# Altium PCB 44TSOPBreakout.PcbDoc
Units mil, origin at the board's own origin, x right, y up, seen from the top; angles counter-clockwise.
Board outline 2000 x 2000 mil, 2 copper layers (Top Layer, Bottom Layer); 5 components, 44 nets, 88 pads, 0 vias.
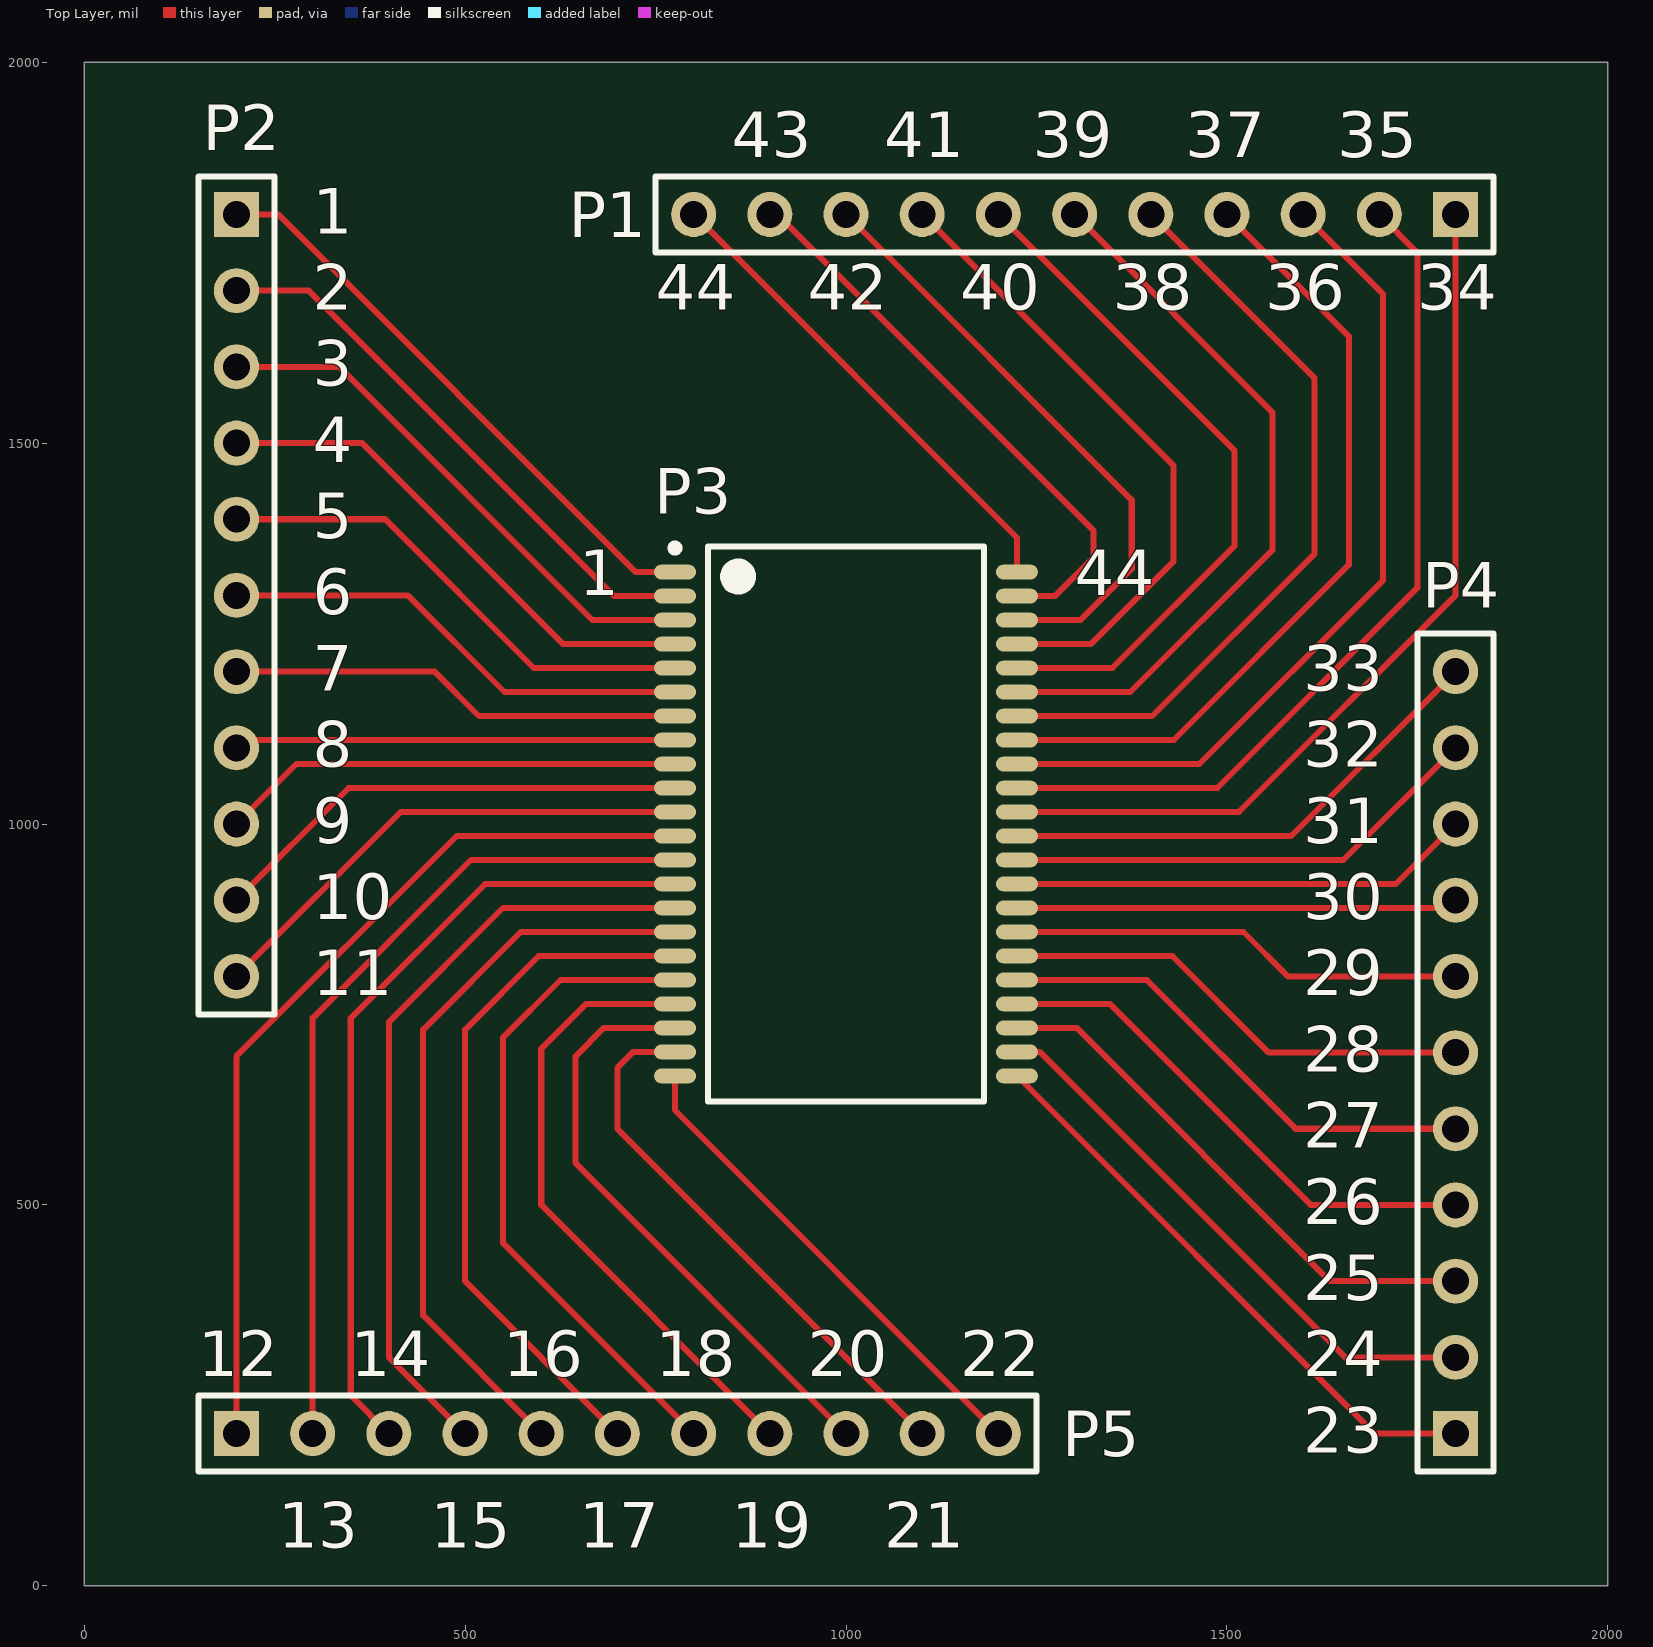
[diagram p0: Top Layer view]
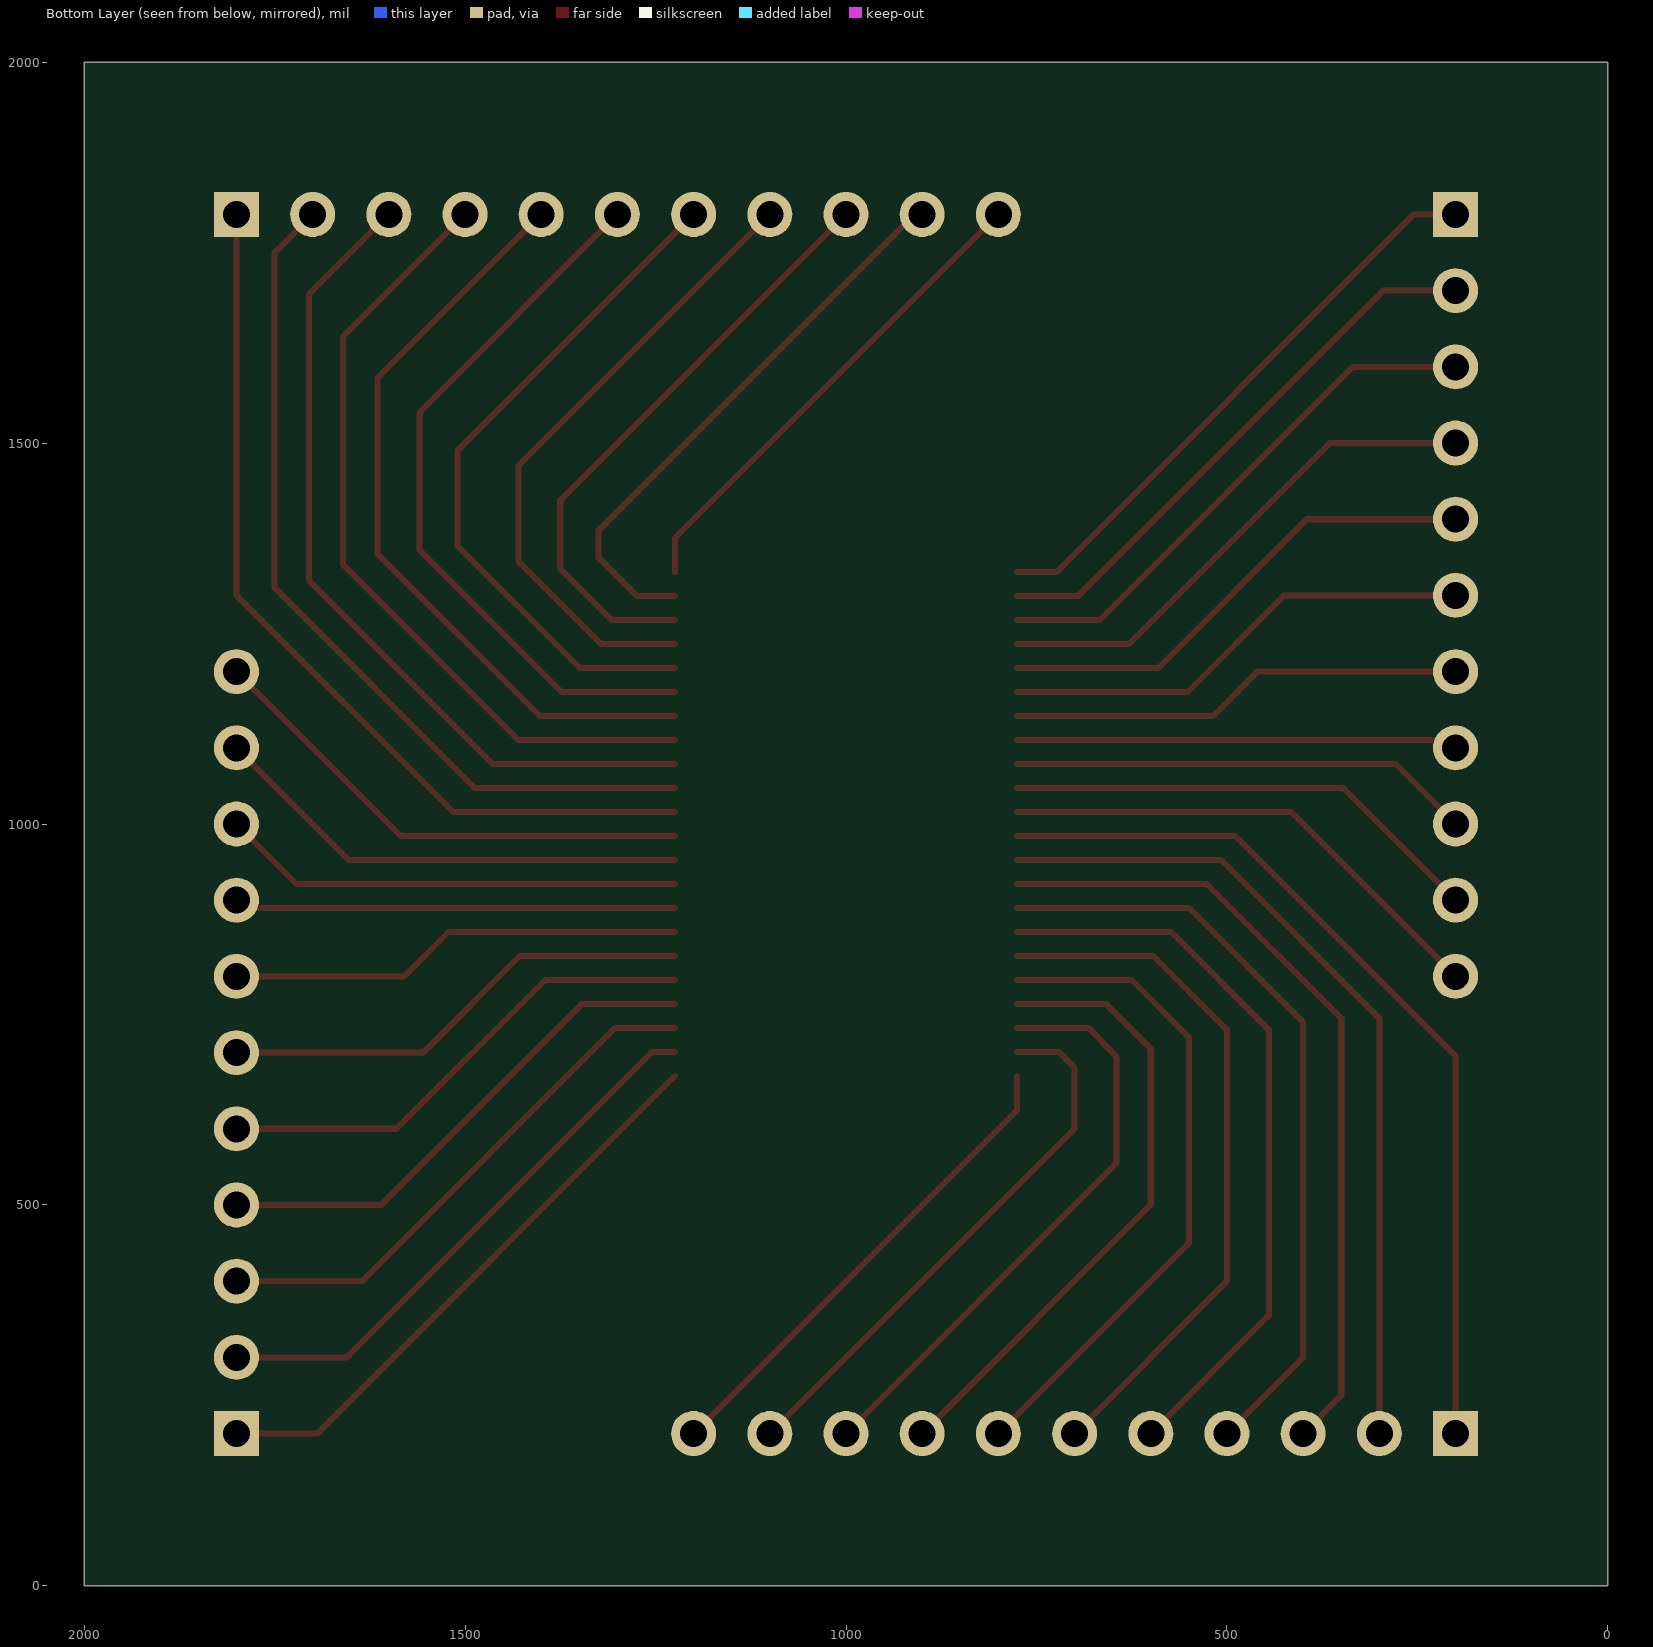
[diagram p1: Bottom Layer view, seen from below]

## Layer stack, top to bottom
Top Solder: solder mask 0.4, Solder Resist, Dk 3.5
Top Layer: signal copper 1.4
Dielectric 1: dielectric 12.6, FR-4, Dk 4.8
Bottom Layer: signal copper 1.4
Bottom Solder: solder mask 0.4, Solder Resist, Dk 3.5

## Board outline
0,0 2000,0 2000,2000 0,2000

## Design rules (kind name [scope] priority, off if disabled: settings)
Clearance [All] p1: gap=8
PolygonConnect [All] p1: connectstyle=Relief reliefconductorwidth=10 reliefentries=4 polygonreliefangle="90 Angle" airgapwidth=10
RoutingVias [All] p1: holewidth=25 width=40 viastyle="Through Hole" minholewidth=28 minwidth=50 maxholewidth=28 maxwidth=50
SolderMaskExpansion [All] p1: expansion=4
Width [All] p1: maxlimit=8 minlimit=8 preferedwidth=8
29 further rules are at their usual default settings.

## Components (designator, comment, footprint, x,y, rotation, side; value= is the part's Value field where it differs from the comment)
P1 "Header 11" HDR1X11 1800,1800 r180 top
P2 "Header 11" HDR1X11 200,1800 r270 top
P3 "71V016SA10PHG8" TSOP80P1180X119-44N 1000,1000 r0 top
P4 "Header 11" HDR1X11 1800,200 r90 top
P5 "Header 11" HDR1X11 200,200 r0 top

## Footprints (in the part's own frame and the unit in brackets; to place one, negate y for a bottom-side part, rotate by r counter-clockwise, add the part's x,y. Pads: shape width x height; smd on the part's side, far side on the other; paste and mask are expansions set on the pad)
HDR1X11 [mm] "Connector; Header; 11 Position"
  rect 1.5x1.5 hole 0.9: 1(0,0)
  round 1.5 hole 0.9: 2(2.54,0) 3(5.08,0) 4(7.62,0) 5(10.16,0) 6(12.7,0) 7(15.24,0) 8(17.78,0) 9(20.32,0) 10(22.86,0) 11(25.4,0)
  silkscreen extent -1.27,-1.27 26.67,1.27
TSOP80P1180X119-44N [mm] "TSOP, 44-Leads, Body 18.41x10.16mm, Pitch 0.80mm, IPC Medium Density"
  oval 1.4x0.5 smd: 1(-5.7,8.4) 2(-5.7,7.6) 3(-5.7,6.8) 4(-5.7,6) 5(-5.7,5.2) 6(-5.7,4.4) 7(-5.7,3.6) 8(-5.7,2.8) 9(-5.7,2) 10(-5.7,1.2) 11(-5.7,0.4) 12(-5.7,-0.4) 13(-5.7,-1.2) 14(-5.7,-2) 15(-5.7,-2.8) 16(-5.7,-3.6) 17(-5.7,-4.4) 18(-5.7,-5.2) 19(-5.7,-6) 20(-5.7,-6.8) 21(-5.7,-7.6) 22(-5.7,-8.4) 23(5.7,-8.4) 24(5.7,-7.6) 25(5.7,-6.8) 26(5.7,-6) 27(5.7,-5.2) 28(5.7,-4.4) 29(5.7,-3.6) 30(5.7,-2.8) 31(5.7,-2) 32(5.7,-1.2) 33(5.7,-0.4) 34(5.7,0.4) 35(5.7,1.2) 36(5.7,2) 37(5.7,2.8) 38(5.7,3.6) 39(5.7,4.4) 40(5.7,5.2) 41(5.7,6) 42(5.7,6.8) 43(5.7,7.6) 44(5.7,8.4)
  silkscreen extent -5.82,-9.25 4.6,9.32, body extent -5.15,-9.25 5.15,9.25, height 1.2

## Part data
P1 P2 P4 P5: "Header, 11-Pin"
P3: "IC SRAM 1MBIT 10NS 44TSOP"

## Nets (pads, with @x,y where several pads share a name; then routed paths per layer and width w, separated by ;. In a path a pad name is that pad's centre, name@x,y a point inside that pad or via, vN(x,y) a via of type N, cw(c..) or ccw(c..) an arc to the next point about the centre after c; other vN are vias at no path point)
NetP1_1: P1.1 P3.34 | length 1193.3
  Top Layer w8: P3.34 1515.75,1015.75 1800,1300 P1.1
NetP1_2: P1.2 P3.35 | length 1145.1
  Top Layer w8: P3.35 1487.24,1047.24 1750,1310 1750,1750 P1.2
NetP1_3: P1.3 P3.36 | length 1104
  Top Layer w8: P3.36 1463.74,1078.74 1705,1320 1705,1695 P1.3
NetP1_4: P1.4 P3.37 | length 1057
  Top Layer w8: P3.37 1430.24,1110.24 1660,1340 1660,1640 P1.4
NetP1_5: P1.5 P3.38 | length 1013
  Top Layer w8: P3.38 1401.73,1141.73 1615,1355 1615,1585 P1.5
NetP1_6: P1.6 P3.39 | length 960.6
  Top Layer w8: P3.39 1373.23,1173.23 1560,1360 1560,1540 P1.6
NetP1_7: P1.7 P3.40 | length 915.4
  Top Layer w8: P1.7 1510,1490 1510,1365 1349.72,1204.72 P3.40
NetP1_8: P1.8 P3.41 | length 842.3
  Top Layer w8: P1.8 1430,1470 1430,1345 1321.22,1236.22 P3.41
NetP1_9: P1.9 P3.42 | length 798.8
  Top Layer w8: P1.9 1375,1425 1375,1335 1307.72,1267.72 P3.42
NetP1_10: P1.10 P3.43 | length 743.5
  Top Layer w8: P1.10@910,1800 1325,1385 1325,1350 1274.21,1299.21 P3.43
NetP1_11: P1.11 P3.44 | length 645.1
  Top Layer w8: P1.11 1224.41,1375.59 P3.44
NetP2_1: P2.1 P3.1 | length 770
  Top Layer w8: P2.1 255,1800 724.29,1330.71 P3.1
NetP2_2: P2.2 P3.2 | length 741.6
  Top Layer w8: P2.2 295,1700 695.79,1299.21 P3.2
NetP2_3: P2.3 P3.3 | length 713.2
  Top Layer w8: P2.3 335,1600 667.28,1267.72 P3.3
NetP2_4: P2.4 P3.4 | length 684.9
  Top Layer w8: P2.4 365,1500 628.78,1236.22 P3.4
NetP2_5: P2.5 P3.5 | length 656.5
  Top Layer w8: P2.5 395,1400 590.28,1204.72 P3.5
NetP2_6: P2.6 P3.6 | length 628.1
  Top Layer w8: P2.6 425,1300 551.77,1173.23 P3.6
NetP2_7: P2.7 P3.7 | length 599.7
  Top Layer w8: P2.7 460,1200 518.27,1141.73 P3.7
NetP2_8: P2.8 P3.8 | length 579.8
  Top Layer w8: P2.8 210.24,1110.24 P3.8
NetP2_9: P2.9 P3.9 | length 608.2
  Top Layer w8: P2.9 278.74,1078.74 P3.9
NetP2_10: P2.10 P3.10 | length 636.6
  Top Layer w8: P2.10 347.24,1047.24 P3.10
NetP2_11: P2.11 P3.11 | length 665
  Top Layer w8: P2.11 415.75,1015.75 P3.11
NetP3_12: P3.12 P5.1 | length 1190.4
  Top Layer w8: P5.1 200,695 489.25,984.25 P3.12
NetP3_13: P3.13 P5.2 | length 1106.6
  Top Layer w8: P5.2 300,745 507.76,952.76 P3.13
NetP3_14: P3.14 P5.3 | length 1064.3
  Top Layer w8: P5.3 350,250 350,745 526.26,921.26 P3.14
NetP3_15: P3.15 P5.4 | length 1019
  Top Layer w8: P5.4 400,300 400,740 549.76,889.76 P3.15
NetP3_16: P3.16 P5.5 | length 977.9
  Top Layer w8: P5.5 445,355 445,730 573.27,858.27 P3.16
NetP3_17: P3.17 P5.6 | length 928.5
  Top Layer w8: P5.6 500,400 500,730 596.77,826.77 P3.17
NetP3_18: P3.18 P5.7 | length 880.3
  Top Layer w8: P3.18 625.28,795.28 550,720 550,450 P5.7
NetP3_19: P3.19 P5.8 | length 829.2
  Top Layer w8: P3.19 658.78,763.78 600,705 600,500 P5.8
NetP3_20: P3.20 P5.9 | length 788.1
  Top Layer w8: P3.20 682.28,732.28 645,695 645,555 P5.9
NetP3_21: P3.21 P5.10 | length 729.9
  Top Layer w8: P3.21 720.79,700.79 700,680 700,600 P5.10
NetP3_22: P3.22 P5.11 | length 645.1
  Top Layer w8: P3.22 775.59,624.41 P5.11
NetP3_23: P3.23 P4.1 | length 770
  Top Layer w8: P3.23 1693.7,200 P4.1
NetP3_24: P3.24 P4.2 | length 741.6
  Top Layer w8: P3.24 1254.21,700.79 1655,300 P4.2
NetP3_25: P3.25 P4.3 | length 713.2
  Top Layer w8: P3.25 1302.72,732.28 1635,400 P4.3
NetP3_26: P3.26 P4.4 | length 684.9
  Top Layer w8: P3.26 1346.22,763.78 1610,500 P4.4
NetP3_27: P3.27 P4.5 | length 656.5
  Top Layer w8: P3.27 1394.72,795.28 1590,600 P4.5
NetP3_28: P3.28 P4.6 | length 628.1
  Top Layer w8: P3.28 1428.23,826.77 1555,700 P4.6
NetP3_29: P3.29 P4.7 | length 599.7
  Top Layer w8: P3.29 1521.73,858.27 1580,800 P4.7
NetP3_30: P3.30 P4.8 | length 579.8
  Top Layer w8: P3.30 1789.76,889.76 P4.8
NetP3_31: P3.31 P4.9 | length 608.2
  Top Layer w8: P3.31 1721.26,921.26 P4.9
NetP3_32: P3.32 P4.10 | length 636.6
  Top Layer w8: P3.32 1652.76,952.76 P4.10
NetP3_33: P3.33 P4.11 | length 665
  Top Layer w8: P3.33 1584.25,984.25 P4.11

## Silkscreen, mask and mechanical layers (free items; w line width, h text height)
Top Overlay:
  text "43" at 850,1875 h60
  text "41" at 1050,1875 h60
  text "39" at 1245,1875 h60
  text "37" at 1445,1875 h60
  text "35" at 1645,1875 h60
  text "1" at 300,1775 h60
  text "2" at 300,1675 h60
  text "44" at 750,1675 h60
  text "42" at 950,1675 h60
  text "40" at 1150,1675 h60
  text "38" at 1350,1675 h60
  text "36" at 1550,1675 h60
  text "34" at 1750,1675 h60
  text "3" at 300,1575 h60
  text "4" at 300,1475 h60
  text "5" at 300,1375 h60
  text "1" at 650,1300 h60
  text "44" at 1300,1300 h60
  text "6" at 300,1275 h60
  text "7" at 300,1175 h60
  text "33" at 1600,1175 h60
  text "8" at 300,1075 h60
  text "32" at 1600,1075 h60
  text "9" at 300,975 h60
  text "31" at 1600,975 h60
  text "10" at 300,875 h60
  text "30" at 1600,875 h60
  text "11" at 300,775 h60
  text "29" at 1600,775 h60
  text "28" at 1600,675 h60
  text "27" at 1600,575 h60
  text "26" at 1600,475 h60
  text "25" at 1600,375 h60
  text "12" at 150,275 h60
  text "14" at 350,275 h60
  text "16" at 550,275 h60
  text "18" at 750,275 h60
  text "20" at 950,275 h60
  text "22" at 1150,275 h60
  text "24" at 1600,275 h60
  text "23" at 1600,175 h60
  text "13" at 255,50 h60
  text "15" at 455,50 h60
  text "17" at 650,50 h60
  text "19" at 850,50 h60
  text "21" at 1050,50 h60